# EAGLE board EagleBoardv2 (EAGLE 6.4)
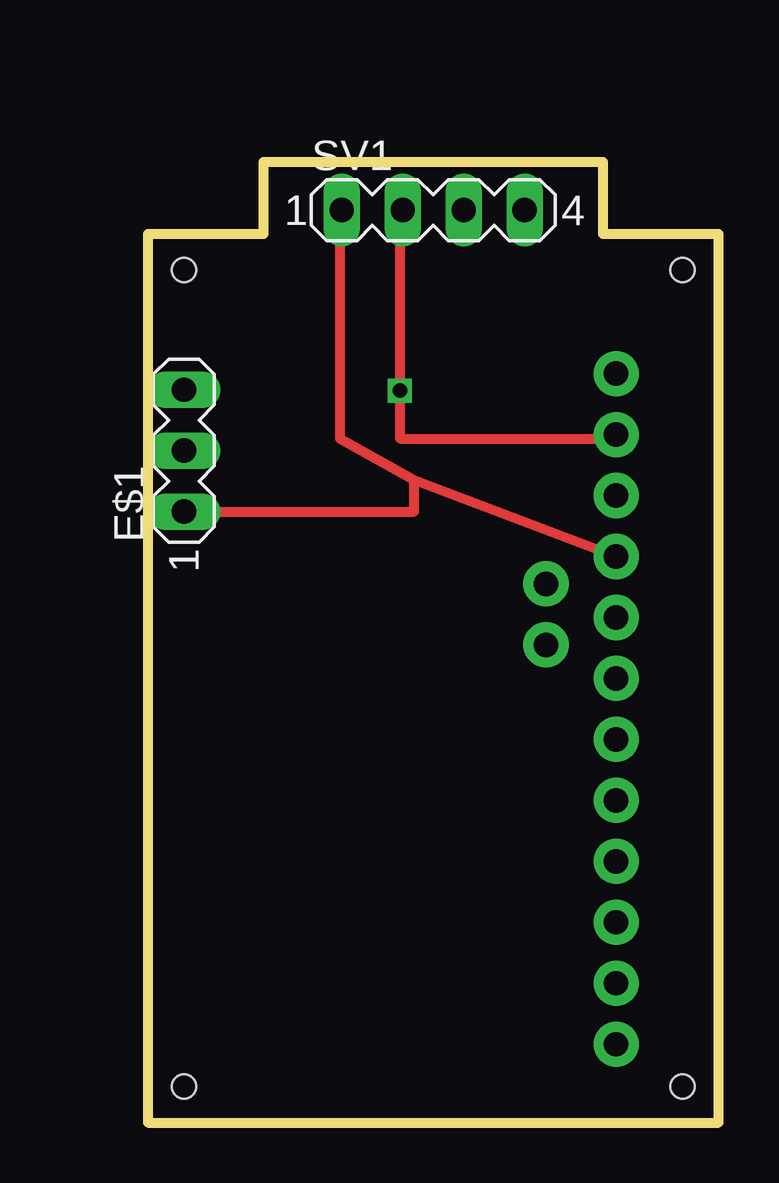
[diagram p0: board, top side]
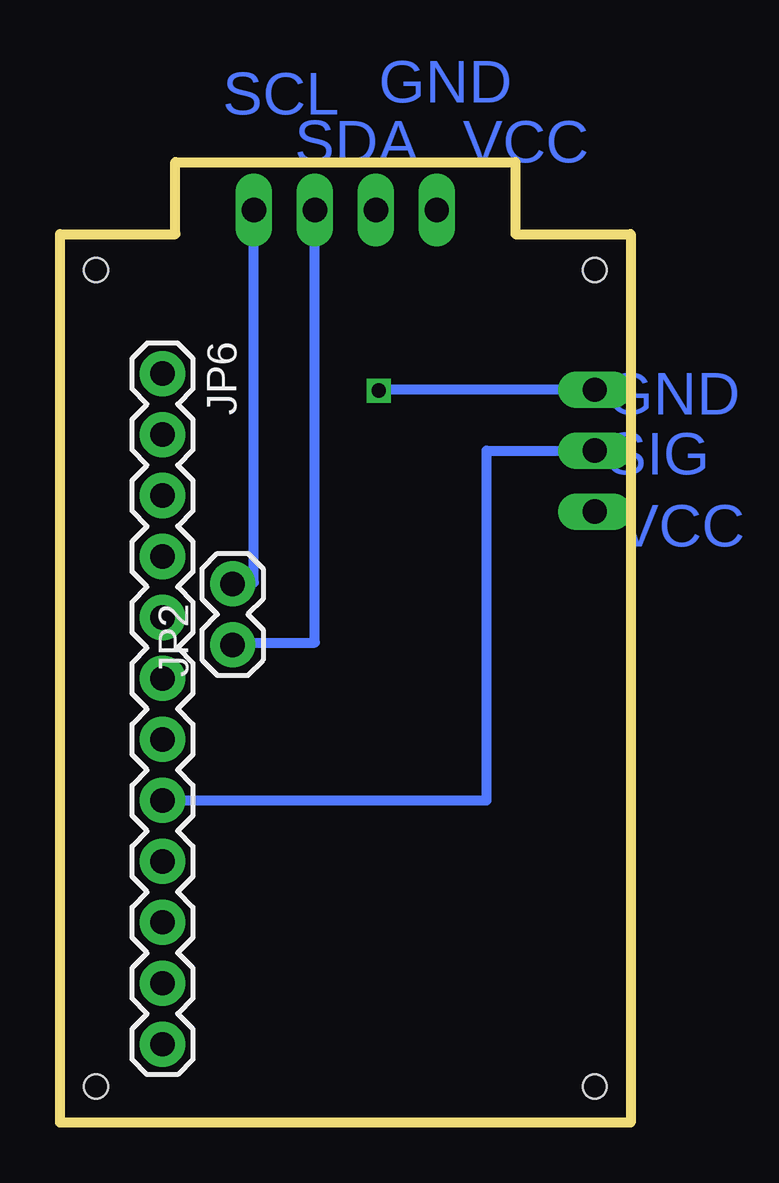
[diagram p1: board, bottom side, seen from below]

Size 23.78 x 40.02 mm. Coordinates in mm from the lower left corner, seen from the top.
Copper layers (1*16): Top 0.035mm / dielectric 1.5mm / Bottom 0.035mm
Design rules "default": minimum track width 10mil, minimum drill 24mil, track to track 8mil, track to pad 8mil, pad to pad 8mil, via to via 8mil, smd to smd 8mil, copper to edge 40mil, drill to drill 8mil, minimum pad ring 10mil, minimum via ring 8mil, stop-mask expansion 4mil, vias tented up to drill 0mil, thermal gap 10mil
Net classes: 0 default: width 0.203 mm, clearance 0.355 mm; 1 vcc: width 0.254 mm, clearance 0.355 mm to class 0, clearance 0.355 mm
Holes 1 mm at 22.28,35.52 1.5,1.5 1.5,35.52 22.28,1.5

## Footprints (pad centres in the part's own frame; a part is rotated, then mirrored left to right if it is on the bottom)
MA03-1 = drill 1.016 long: 1 -2.54,0; 2 0,0; 3 2.54,0
1X02 = drill 1.016 pad 1.88: 1 0,0; 2 2.54,0
1X12 = drill 1.016 pad 1.88: 1 0,0; 2 2.54,0; 3 5.08,0; 4 7.62,0; 5 10.16,0; 6 12.7,0; 7 15.24,0; 8 17.78,0; 9 20.32,0; 10 22.86,0; 11 25.4,0; 12 27.94,0
MA04-1 = drill 1.016 long: 1 -3.81,0; 2 -1.27,0; 3 1.27,0; 4 3.81,0

## Placement (x,y rotation side)
E$1  [MA03-1]  1.5,28 90 top
JP2  [1X02]  16.59,19.91 90 bottom
JP6  [1X12]  19.51,31.21 270 bottom
SV1  [MA04-1]  11.89,38.02 0 top

## Library data of the parts
E$1 = con-lstb
JP2 JP6 = SparkFun
SV1 = con-lstb; OC_FARNELL: unknown; OC_NEWARK: unknown

## Nets
S$2: JP2.1 SV1.3
S$3: JP2.2 SV1.4
S$4: E$1.1 JP6.4 SV1.1
S$5: E$1.2 JP6.8
S$6: E$1.3 JP6.2 SV1.2

## Tracks (layer width: path | path; a pad name or v marks a point on that pad's centre or on a via)
S$2
  Bottom 0.406: JP2.1 16.59,20 13.16,20 SV1.3
S$3
  Bottom 0.406: JP2.2 16.59,22.5 15.7,22.5 SV1.4
S$4
  Top 0.406: SV1.1 8,38.02 8,28.5 11.1,26.76 | JP6.4 11.1,26.76 | E$1.1 11.1,25.46 11.1,26.76
S$5
  Bottom 0.406: JP6.8 6,13.43 6,28 E$1.2
S$6  (via drill 0.6)
  Top 0.406: SV1.2 10.5,38.02 v10.5,30.5 10.5,28.5 19.51,28.5 JP6.2
  Bottom 0.406: E$1.3 10.5,30.54 v10.5,30.5

## Text on the board
Bottom: GND | SCL | VCC | SDA | GND | SIG | VCC